# Altium PCB Indicator.PcbDoc
Units mm, origin at the board's own origin, x right, y up, seen from the top; angles counter-clockwise.
Board outline not stored, 2 copper layers (Top Layer, Bottom Layer); 28 components, 0 nets, 112 pads, 0 vias.
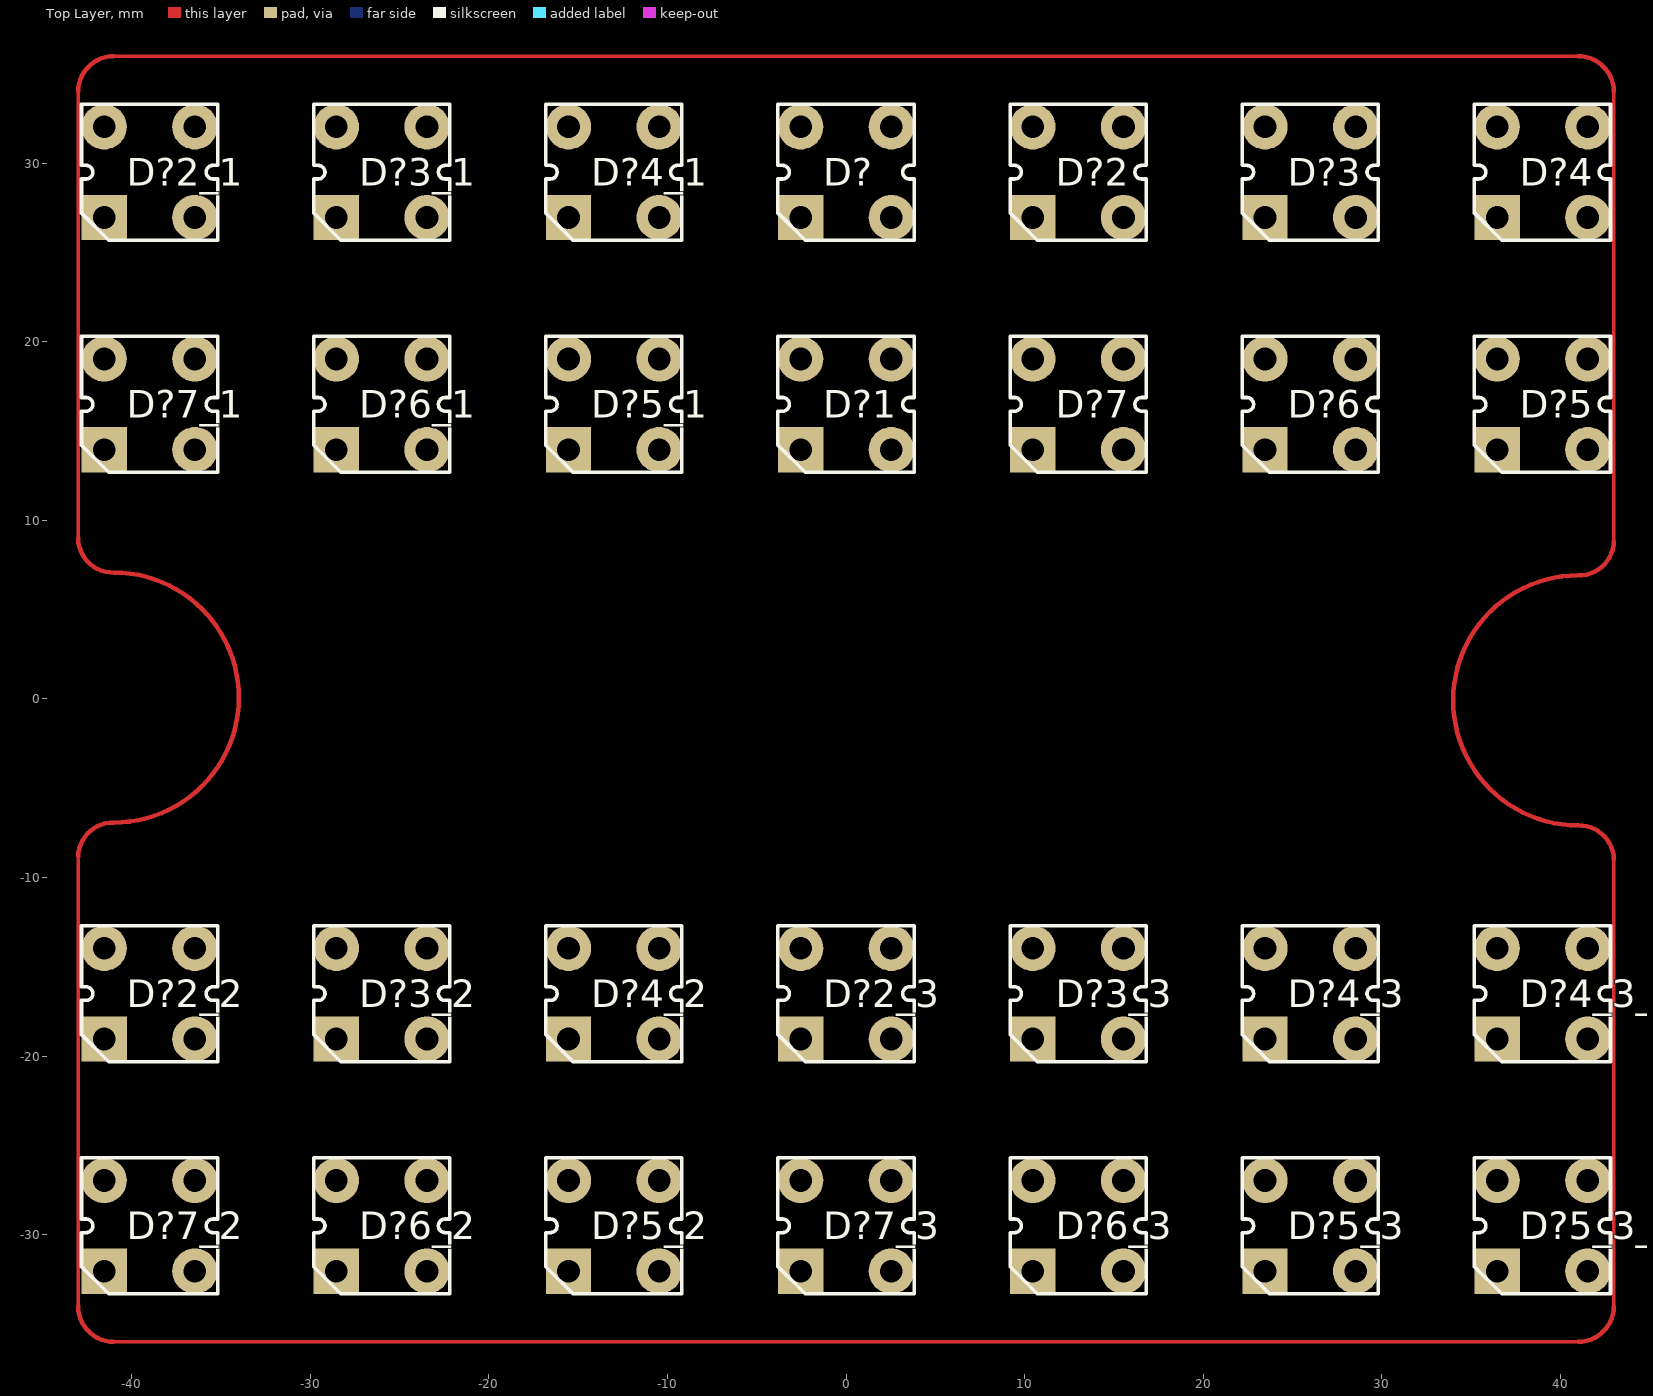
[diagram p0: Top Layer view]
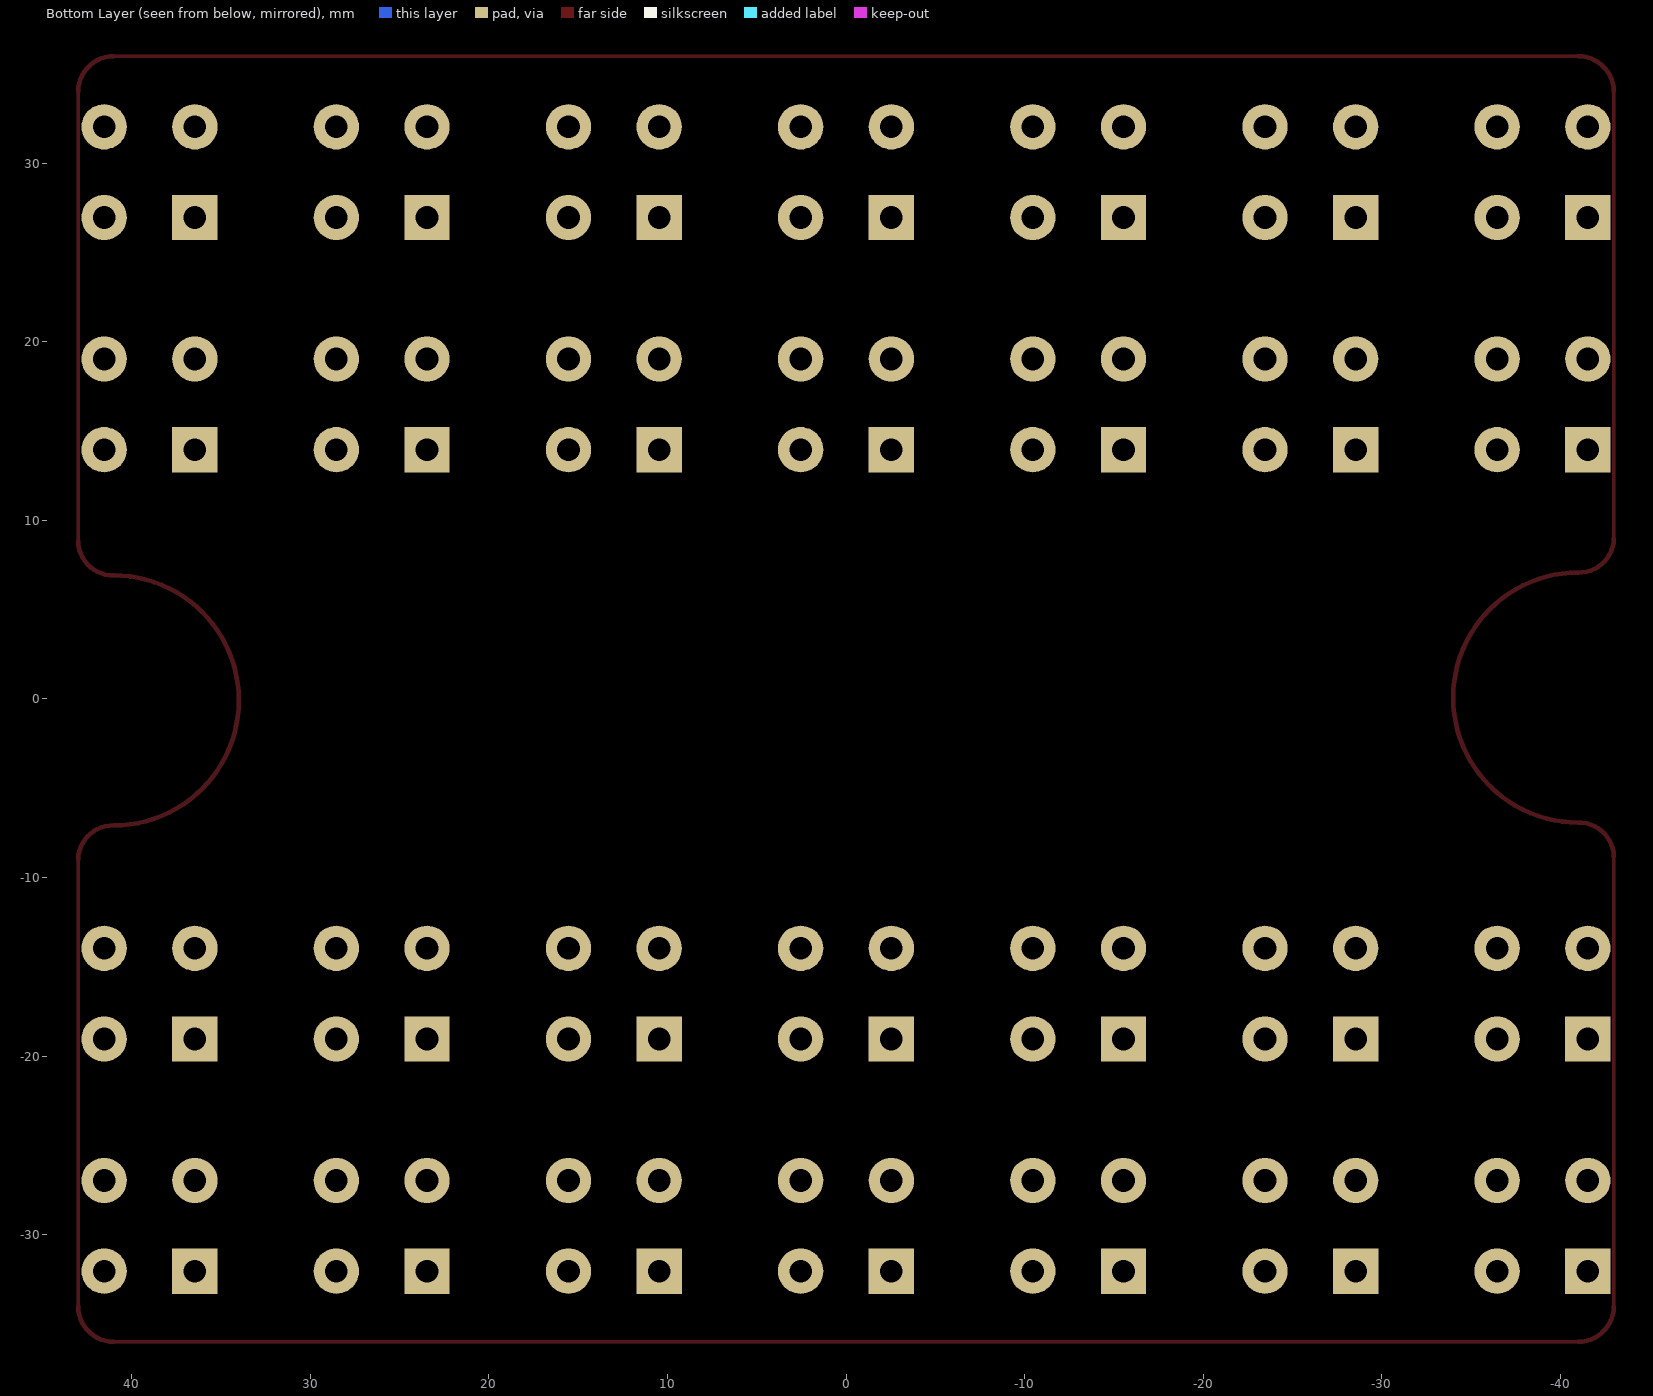
[diagram p1: Bottom Layer view, seen from below]

## Layer stack, top to bottom
Top Solder: solder mask 0.0102, Solder Resist, Dk 3.5
Top Layer: signal copper 0.0356
Dielectric 1: dielectric 0.32, FR-4, Dk 4.8
Bottom Layer: signal copper 0.0356
Bottom Solder: solder mask 0.0102, Solder Resist, Dk 3.5

## Design rules (kind name [scope] priority, off if disabled: settings)
Clearance [All] p1: gap=0.254
PolygonConnect [All] p1: connectstyle=Relief reliefconductorwidth=0.254 reliefentries=4 polygonreliefangle="90 Angle" airgapwidth=0.254
RoutingVias [All] p1: holewidth=0.711 width=1.27 viastyle="Through Hole" minholewidth=0.711 minwidth=1.27 maxholewidth=0.711 maxwidth=1.27
SolderMaskExpansion [All] p1: expansion=0.102
Width [All] p1: maxlimit=0.254 minlimit=0.254 preferedwidth=0.254
30 further rules are at their usual default settings.

## Components (designator, comment, footprint, x,y, rotation, side; value= is the part's Value field where it differs from the comment)
D? "AMBER" "CREE P4 YELLOW" 0,29.5 r90 top (schematic designator D11)
D?1 "AMBER" "CREE P4 YELLOW" 0,16.5 r90 top (schematic designator D11)
D?2 "AMBER" "CREE P4 YELLOW" 13,29.5 r90 top (schematic designator D11)
D?2_1 "AMBER" "CREE P4 YELLOW" -39,29.5 r90 top (schematic designator D11)
D?2_2 "AMBER" "CREE P4 YELLOW" -39,-16.5 r90 top (schematic designator D11)
D?2_3 "AMBER" "CREE P4 YELLOW" 0,-16.5 r90 top (schematic designator D11)
D?3 "AMBER" "CREE P4 YELLOW" 26,29.5 r90 top (schematic designator D11)
D?3_1 "AMBER" "CREE P4 YELLOW" -26,29.5 r90 top (schematic designator D11)
D?3_2 "AMBER" "CREE P4 YELLOW" -26,-16.5 r90 top (schematic designator D11)
D?3_3 "AMBER" "CREE P4 YELLOW" 13,-16.5 r90 top (schematic designator D11)
D?4 "AMBER" "CREE P4 YELLOW" 39,29.5 r90 top (schematic designator D11)
D?4_1 "AMBER" "CREE P4 YELLOW" -13,29.5 r90 top (schematic designator D11)
D?4_2 "AMBER" "CREE P4 YELLOW" -13,-16.5 r90 top (schematic designator D11)
D?4_3 "AMBER" "CREE P4 YELLOW" 26,-16.5 r90 top (schematic designator D11)
D?4_3_1 "AMBER" "CREE P4 YELLOW" 39,-16.5 r90 top (schematic designator D11)
D?5 "AMBER" "CREE P4 YELLOW" 39,16.5 r90 top (schematic designator D11)
D?5_1 "AMBER" "CREE P4 YELLOW" -13,16.5 r90 top (schematic designator D11)
D?5_2 "AMBER" "CREE P4 YELLOW" -13,-29.5 r90 top (schematic designator D11)
D?5_3 "AMBER" "CREE P4 YELLOW" 26,-29.5 r90 top (schematic designator D11)
D?5_3_1 "AMBER" "CREE P4 YELLOW" 39,-29.5 r90 top (schematic designator D11)
D?6 "AMBER" "CREE P4 YELLOW" 26,16.5 r90 top (schematic designator D11)
D?6_1 "AMBER" "CREE P4 YELLOW" -26,16.5 r90 top (schematic designator D11)
D?6_2 "AMBER" "CREE P4 YELLOW" -26,-29.5 r90 top (schematic designator D11)
D?6_3 "AMBER" "CREE P4 YELLOW" 13,-29.5 r90 top (schematic designator D11)
D?7 "AMBER" "CREE P4 YELLOW" 13,16.5 r90 top (schematic designator D11)
D?7_1 "AMBER" "CREE P4 YELLOW" -39,16.5 r90 top (schematic designator D11)
D?7_2 "AMBER" "CREE P4 YELLOW" -39,-29.5 r90 top (schematic designator D11)
D?7_3 "AMBER" "CREE P4 YELLOW" 0,-29.5 r90 top (schematic designator D11)

## Footprints (in the part's own frame and the unit in brackets; to place one, negate y for a bottom-side part, rotate by r counter-clockwise, add the part's x,y. Pads: shape width x height; smd on the part's side, far side on the other; paste and mask are expansions set on the pad)
"CREE P4 YELLOW" [mm] "CREE P4 YELLOW"
  rect 2.54x2.54 hole 1.27 unplated: 1(-2.54,2.54)
  round 2.54 hole 1.27 unplated: 2(-2.54,-2.54) 3(2.54,-2.54) 4(2.54,2.54)
  silkscreen extent -3.81,-3.81 3.81,3.81, body extent -3.81,-3.81 3.81,3.81, height 6.91

## Part data
D? D?1 D?2 D?2_1 D?2_2 D?2_3 D?3 D?3_1 D?3_2 D?3_3 D?4 D?4_1 D?4_2 D?4_3 D?4_3_1 D?5 D?5_1 D?5_2 D?5_3 D?5_3_1 D?6 D?6_1 D?6_2 D?6_3 D?7 D?7_1 D?7_2 D?7_3: library part CP41B-AFSCM0Q0264, "CREE AMBER LED P4 (SUPERFLUX)"

## Nets (pads, with @x,y where several pads share a name; then routed paths per layer and width w, separated by ;. In a path a pad name is that pad's centre, name@x,y a point inside that pad or via, vN(x,y) a via of type N, cw(c..) or ccw(c..) an arc to the next point about the centre after c; other vN are vias at no path point)
pads on no net: D?1.1 D?1.2 D?1.3 D?1.4 D?2.1 D?2.2 D?2.3 D?2.4 D?2_1.1 D?2_1.2 D?2_1.3 D?2_1.4 D?2_2.1 D?2_2.2 D?2_2.3 D?2_2.4 D?2_3.1 D?2_3.2 D?2_3.3 D?2_3.4 D?3.1 D?3.2 D?3.3 D?3.4 D?3_1.1 D?3_1.2 D?3_1.3 D?3_1.4 D?3_2.1 D?3_2.2 D?3_2.3 D?3_2.4 D?3_3.1 D?3_3.2 D?3_3.3 D?3_3.4 D?4.1 D?4.2 D?4.3 D?4.4 D?4_1.1 D?4_1.2 D?4_1.3 D?4_1.4 D?4_2.1 D?4_2.2 D?4_2.3 D?4_2.4 D?4_3.1 D?4_3.2 D?4_3.3 D?4_3.4 D?4_3_1.1 D?4_3_1.2 D?4_3_1.3 D?4_3_1.4 D?5.1 D?5.2 D?5.3 D?5.4 D?5_1.1 D?5_1.2 D?5_1.3 D?5_1.4 D?5_2.1 D?5_2.2 D?5_2.3 D?5_2.4 D?5_3.1 D?5_3.2 D?5_3.3 D?5_3.4 D?5_3_1.1 D?5_3_1.2 D?5_3_1.3 D?5_3_1.4 D?6.1 D?6.2 D?6.3 D?6.4 D?6_1.1 D?6_1.2 D?6_1.3 D?6_1.4 D?6_2.1 D?6_2.2 D?6_2.3 D?6_2.4 D?6_3.1 D?6_3.2 D?6_3.3 D?6_3.4 D?7.1 D?7.2 D?7.3 D?7.4 D?7_1.1 D?7_1.2 D?7_1.3 D?7_1.4 D?7_2.1 D?7_2.2 D?7_2.3 D?7_2.4 D?7_3.1 D?7_3.2 D?7_3.3 D?7_3.4 D?.1 D?.2 D?.3 D?.4
copper on no net: | length 333
  Top Layer w0.2: -43,-34 -43,-9 ; -43,9 -43,34 ; -41,-36 41,-36 ; -41,36 41,36 ; 43,-34 43,-9 ; 43,8.84 43,34
  Top Layer w0.254: -43,-34 ccw(c-41,-34) -41,-36 ; -43,-8.84 cw(c-41.04,-8.88) -41,-6.92 ccw(c-41,0.08) -41,7.08 cw(c-41.04,9.04) -43,9 ; -43,34 cw(c-41,34) -41,36 ; 41,-36 ccw(c41,-34) 43,-34 ; 41,36 cw(c41,34) 43,34 ; 43,-9 ccw(c41.04,-9.04) 41,-7.08 cw(c41,-0.08) 41,6.92 ccw(c41.04,8.88) 43,8.84

## Silkscreen, mask and mechanical layers (free items; w line width, h text height)
Mechanical 1:
  lines w0.2: -43,-9 -43,-34 ; -43,9 -43,34 ; -41,-36 41,-36 ; -41,36 41,36 ; 43,-34 43,-9 ; 43,8.84 43,34 ; -43,-34 -43,-34
  lines w0.254: -43,-34 ccw(c-41,-34) -41,-36 ; -43,-8.84 cw(c-41.04,-8.88) -41,-6.92 ccw(c-41,0.08) -41,7.08 cw(c-41.04,9.04) -43,9 ; -43,34 cw(c-41,34) -41,36 ; 41,-36 ccw(c41,-34) 43,-34 ; 41,36 cw(c41,34) 43,34 ; 43,-9 ccw(c41.04,-9.04) 41,-7.08 cw(c41,-0.08) 41,6.92 ccw(c41.04,8.88) 43,8.84
Mechanical 2:
  lines w0.2: -43,10 43,10 ; -39,-30.5 -39,-28.5 ; -39,-29.5 -26,-29.5 -13,-29.5 0,-29.5 ; -39,-17.5 -39,-15.5 ; -39,-16.5 -26,-16.5 -13,-16.5 0,-16.5 ; -39,15.5 -39,17.5 ; -39,16.5 -26,16.5 -13,16.5 0,16.5 ; -39,28.5 -39,30.5 ; -39,29.5 -26,29.5 -13,29.5 0,29.5 ; -26,-30.5 -26,-28.5 ; -26,-17.5 -26,-15.5 ; -26,15.5 -26,17.5 ; -26,28.5 -26,30.5 ; -13,-30.5 -13,-28.5 ; -13,-17.5 -13,-15.5 ; -13,15.5 -13,17.5 ; -13,28.5 -13,30.5 ; 0,-36 0,-29.5 ; 0,-10 0,0 ; 0,36 0,29.5 ; 0.555,0 0,0 ; 13,-30.5 13,-28.5 ; 13,-17.5 13,-15.5 ; 13,15.5 13,17.5 ; 13,28.5 13,30.5 ; 26,-30.5 26,-28.5 ; 26,-17.5 26,-15.5 ; 26,15.5 26,17.5 ; 26,28.5 26,30.5 ; 39,-30.5 39,-28.5 ; 39,-29.5 26,-29.5 13,-29.5 0,-29.5 ; 39,-17.5 39,-15.5 ; 39,-16.5 26,-16.5 13,-16.5 0,-16.5 ; 39,15.5 39,17.5 ; 39,16.5 26,16.5 13,16.5 0,16.5 ; 39,28.5 39,30.5 ; 39,29.5 26,29.5 13,29.5 0,29.5 ; -1,-16.5 1,-16.5 ; -1,-16.5 1,-16.5 ; -1,-16.5 1,-16.5 ; -1,16.5 1,16.5 ; -1,16.5 1,16.5 ; -1,16.5 1,16.5 ; 0,-29.5 0,-16.5 ; 0,0 0,10 0,16.5 ; 0,16.5 0,29.5 ; -1,-29.5 1,-29.5 -1,-29.5 ; -1,29.5 1,29.5 -1,29.5